# Altium PCB H_bridge_PCB.PcbDoc
Units mil, origin at the board's own origin, x right, y up, seen from the top; angles counter-clockwise.
Board outline 3775 x 4000 mil, 2 copper layers (Top Layer, Bottom Layer); 43 components, 40 nets, 147 pads, 6 vias.
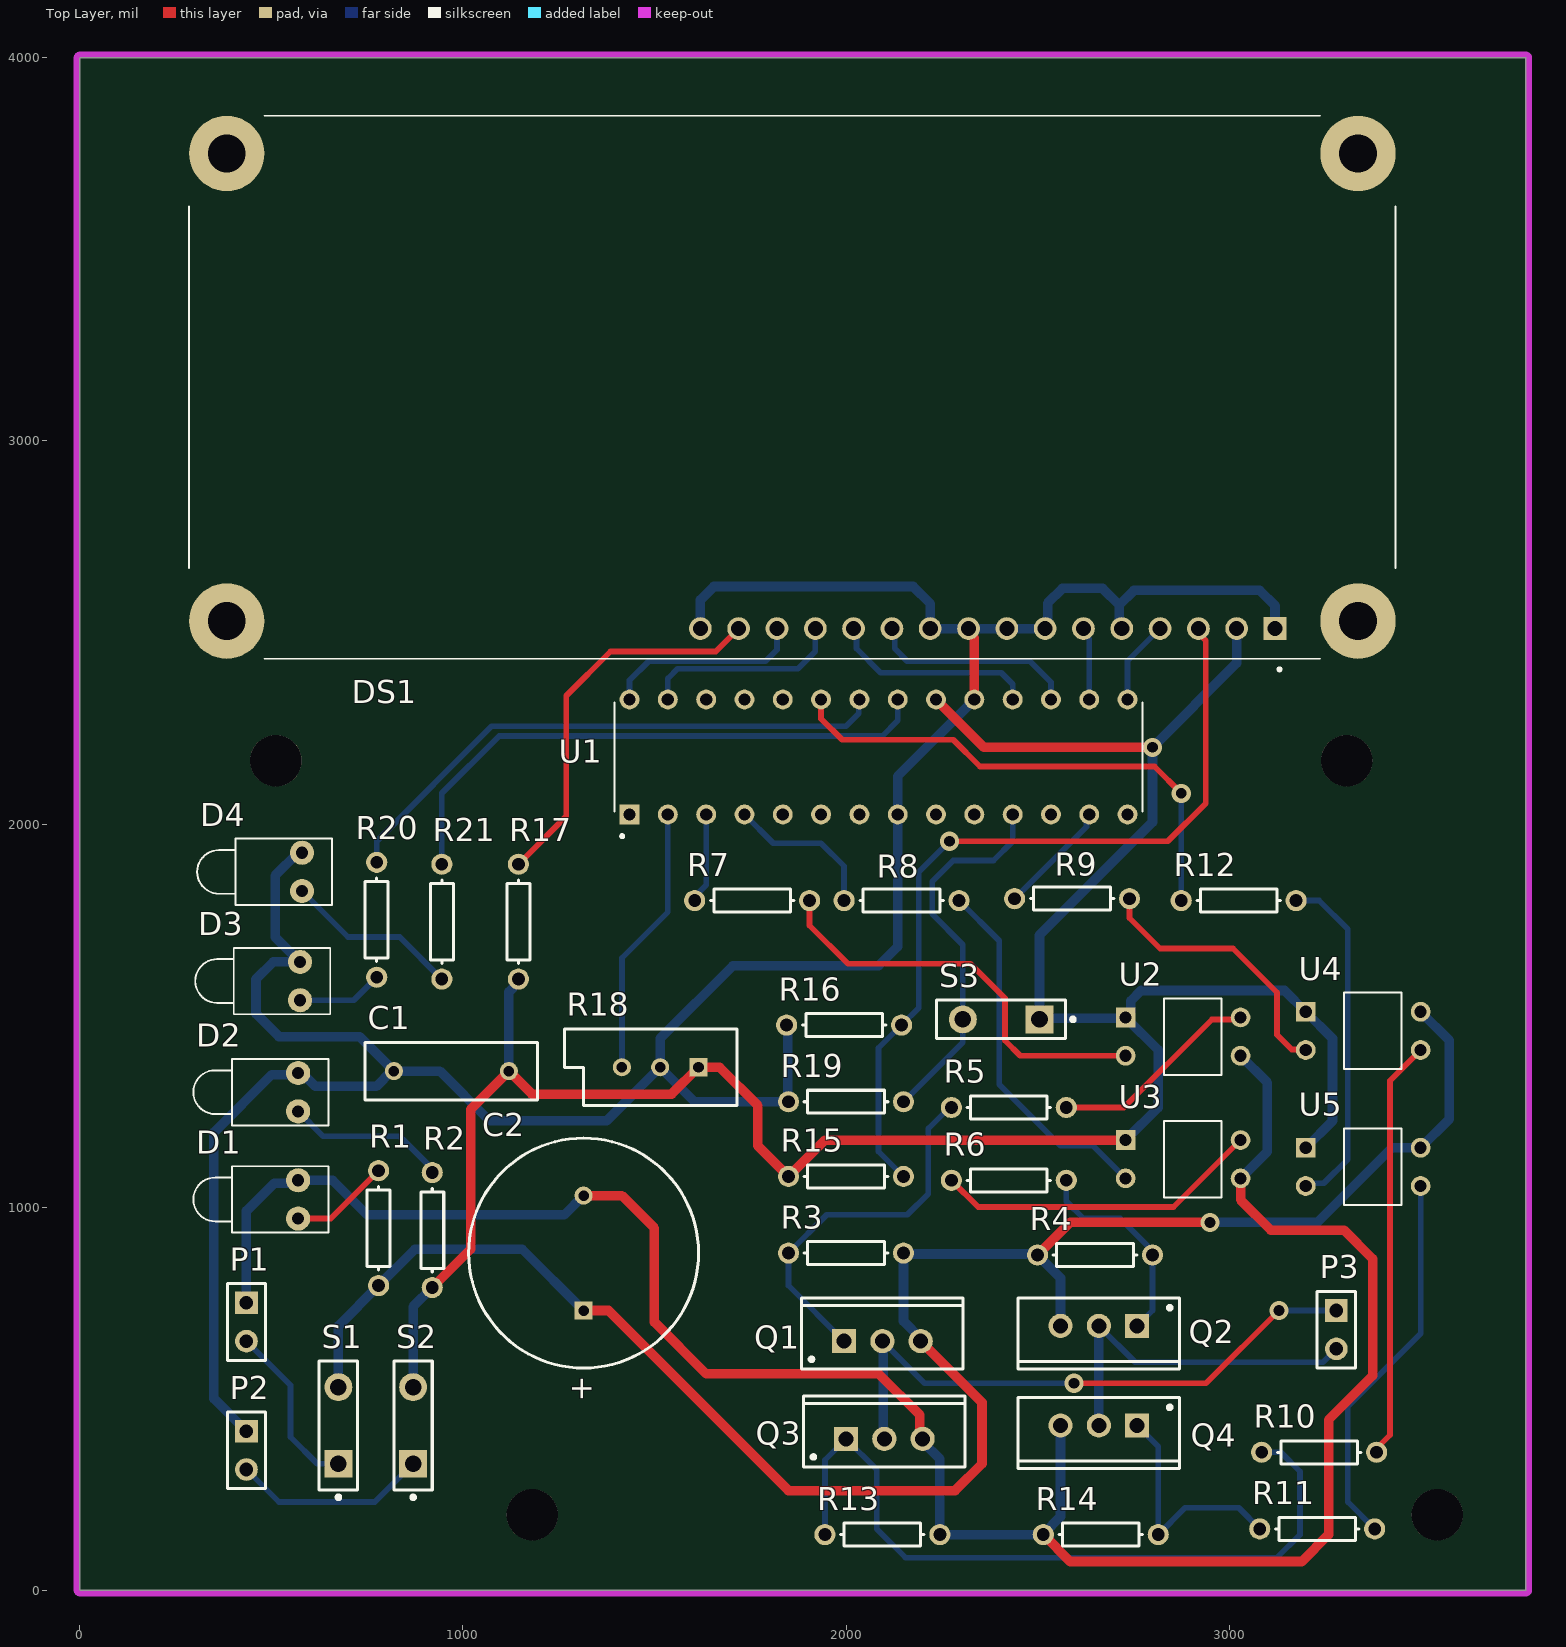
[diagram p0: Top Layer view]
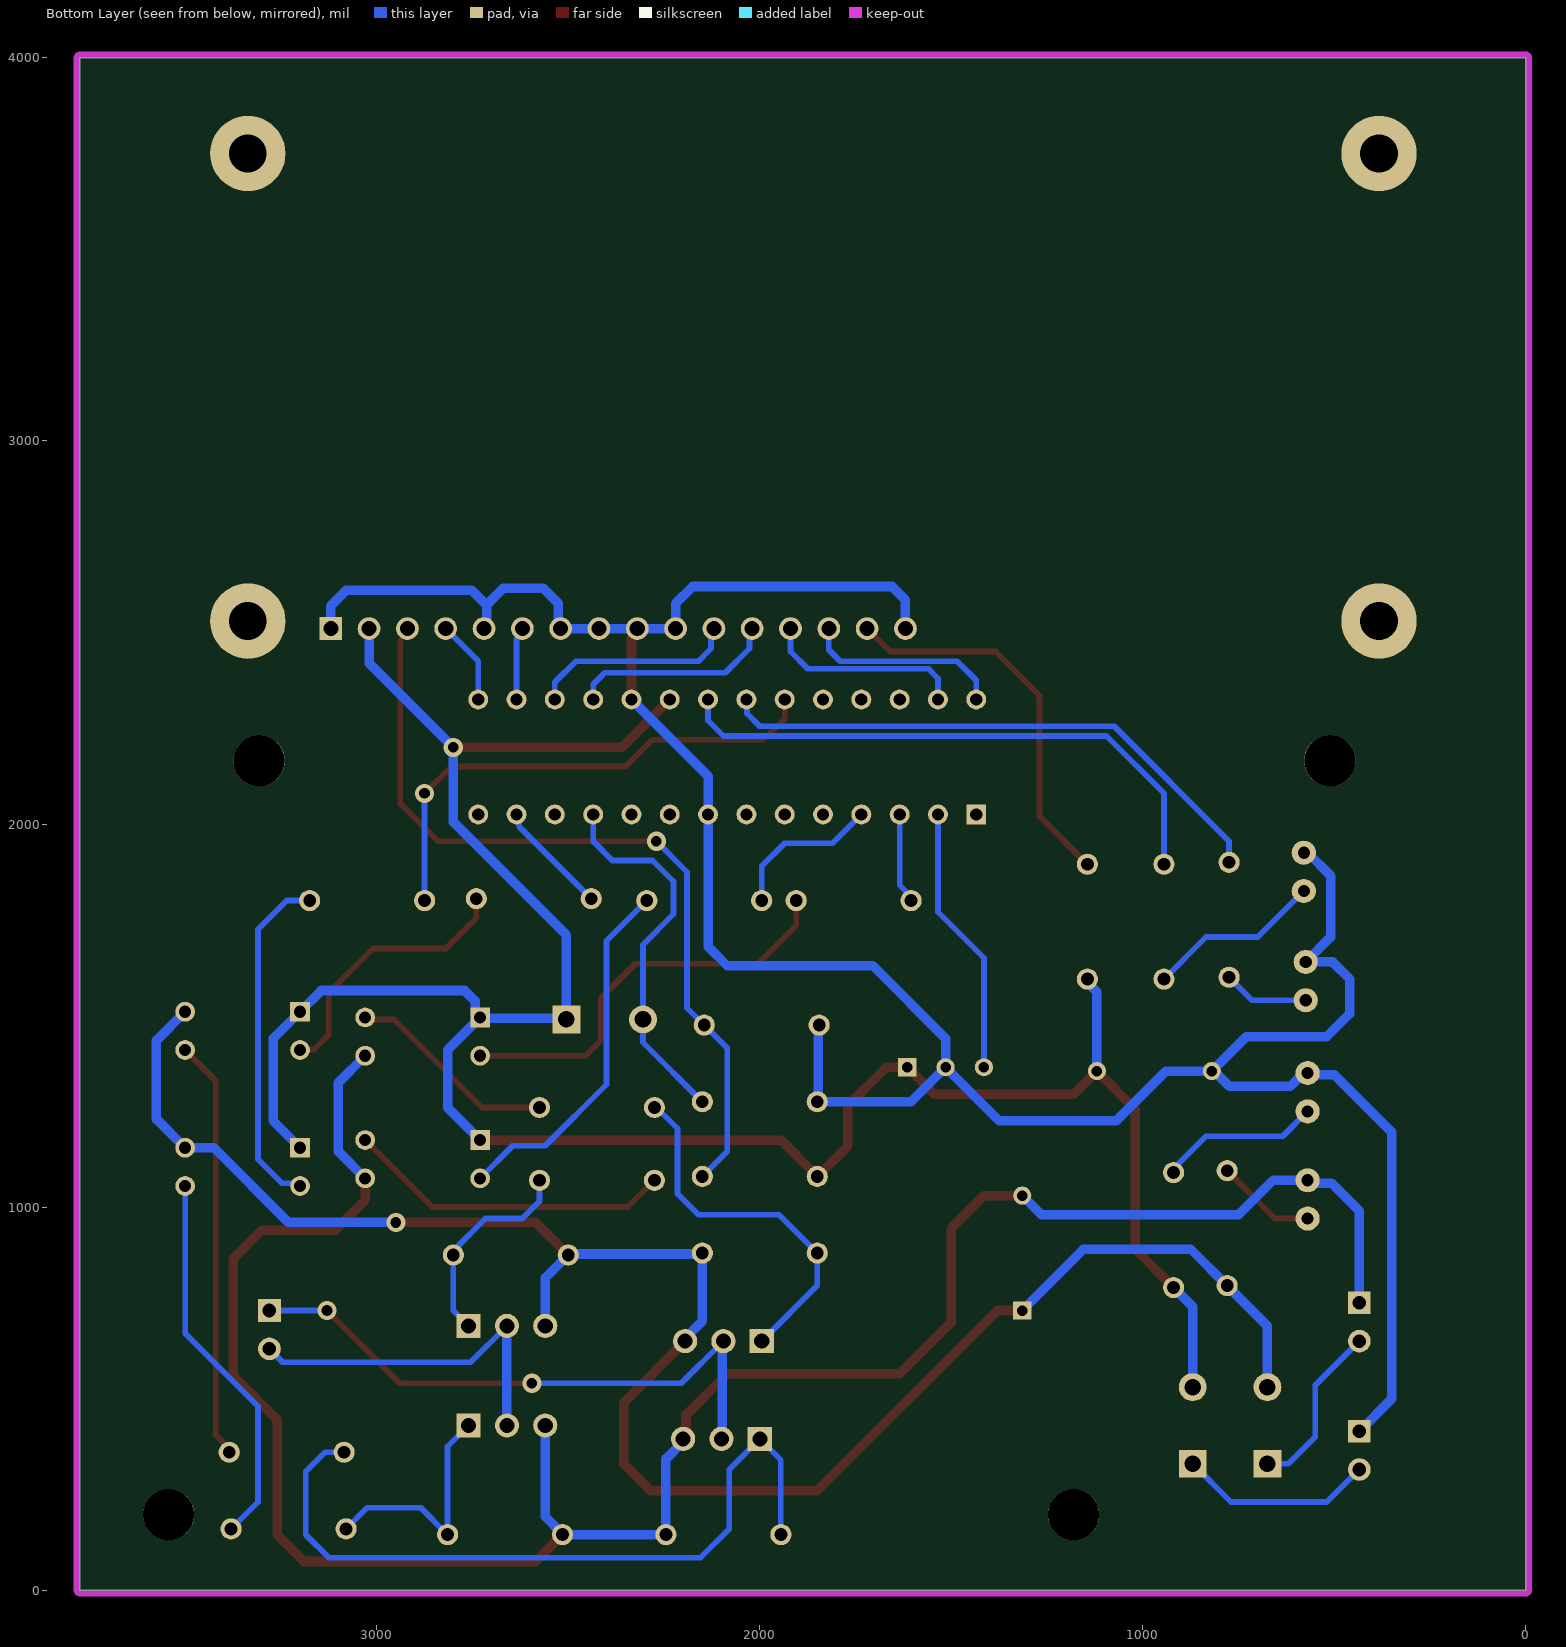
[diagram p1: Bottom Layer view, seen from below]

## Layer stack, top to bottom
Top Solder: solder mask 0.4, Solder Resist, Dk 3.5
Top Layer: signal copper 1.4
Dielectric 1: dielectric 12.6, FR-4, Dk 4.8
Bottom Layer: signal copper 1.4
Bottom Solder: solder mask 0.4, Solder Resist, Dk 3.5

## Board outline
0,0 3775,0 3775,4000 0,4000

## Design rules (kind name [scope] priority, off if disabled: settings)
BoardOutlineClearance [All] p1: gap=7.87 ignorepadtopadclearanceinfootprint=FALSE except(15.75: Arc-SplitBarrior Arc-SplitContinuation Track-SplitBarrior Track-SplitContinuation SMDPad-SplitBarrior SMDPad-SplitContinuation THPad-SplitBarrior THPad-SplitContinuation Via-SplitBarrior Via-SplitContinuation Fill-SplitBarrior Fill-SplitContinuation Poly-SplitBarrior Poly-SplitContinuation Region-SplitBarrior Region-SplitContinuation Text-SplitBarrior Text-SplitContinuation)
Clearance "Clearance Bottom Layer" [OnLayer('Bottom Layer')] p1: gap=8 ignorepadtopadclearanceinfootprint=TRUE except(10: Arc-Text Track-Text SMDPad-Text THPad-Text Via-Text Fill-Text Poly-Text Region-Text Text-Text)
Clearance "Clearance Top Layer" [OnLayer('Top Layer')] p2: gap=8 ignorepadtopadclearanceinfootprint=TRUE except(10: Arc-Text Track-Text SMDPad-Text THPad-Text Via-Text Fill-Text Poly-Text Region-Text Text-Text)
Clearance [All] p3: gap=7.87 ignorepadtopadclearanceinfootprint=FALSE except(3.5: Arc-Arc Arc-Track Arc-SMDPad Track-Track Track-SMDPad SMDPad-SMDPad; 5: Arc-Via Track-Via SMDPad-Via THPad-Via Via-Via; 10: Arc-Text Track-Text SMDPad-Text THPad-Text Via-Text Fill-Text Poly-Text Region-Text Text-Text)
HoleSize [All] p1: absolutevalues=TRUE maxlimit=248.03 minlimit=7.87 maxpercent=80.000 minpercent=20.000
MinimumAnnularRing [All] p1: minimumring=3
MinimumSolderMaskSliver [All] p1: minsoldermaskwidth=3.94
PolygonConnect PolygonConnect_1 [All] p1: thpad.connectstyle=Relief thpad.reliefconductorwidth=20 thpad.reliefentries=4 thpad.polygonreliefangle="90 Angle" thpad.airgapwidth=10 smdpad.connectstyle=Relief smdpad.reliefconductorwidth=20 smdpad.reliefentries=4 smdpad.polygonreliefangle="90 Angle" smdpad.airgapwidth=10 via.connectstyle=Direct via.reliefconductorwidth=20 via.reliefentries=4 via.polygonreliefangle="90 Angle" via.airgapwidth=10
RoutingVias [All] p1: holewidth=28 width=50 viastyle="Through Hole" minholewidth=8 minwidth=16 maxholewidth=28 maxwidth=50
SilkToSilkClearance [All] p1: silktosilkclearance=3.94
SilkToSolderMaskClearance [IsPad] p1: minsilkscreentomaskgap=3.94 clearancetoexposedcopper=TRUE
SolderMaskExpansion [All] p1: expansion=4 istentingtop=FALSE
Width POWER [InNetClass('POWER')] p1: maxlimit=25 minlimit=5 preferedwidth=25 minimp=50.000000 maximp=50.000000 favimp=50.000000
Width [InNetClass('SIGNALS')] p2: maxlimit=25 minlimit=5 preferedwidth=15 minimp=50.000000 maximp=50.000000 favimp=50.000000
26 further rules are at their usual default settings.

## Classes and differential pairs
net class SIGNALS: LCD_D4 LCD_D5 LCD_D6 LCD_D7 LCD_EN LCD_RS NetD1_1 NetD2_1 NetD3_1 NetD4_1 NetDS1_3 NetDS1_15 NetP1_2 NetP2_2 NetQ1_1 NetQ2_1 NetQ3_1 NetQ4_1 NetR5_1 NetR6_1 NetR7_1 NetR7_2 NetR8_1 NetR8_2 NetR9_1 NetR9_2 NetR10_2 NetR11_2 NetR12_1 NetR12_2 NetR18_3 NetR19_2 NetR20_2 NetR21_2
net class POWER: +5 +12 GND MCUGND NetP3_1 NetP3_2
net class LCD_D[4..7]: LCD_D4 LCD_D5 LCD_D6 LCD_D7
component class "U_Power Supply": D1 D2 P1 P2 R1 R2 S1 S2
component class U_Microcontroller: C1 U1
component class U_H_bridge: C2 Q1 Q2 Q3 Q4 R3 R4 R5 R6 R7 R8 R9 R10 R11 R12 R13 R14 U2 U3 U4 U5
component class Top_level: D3 D4 DS1 P3 R15 R16 R17 R18 R19 R20 R21 S3

## Components (designator, comment, footprint, x,y, rotation, side; value= is the part's Value field where it differs from the comment)
C1 "Cap" RAD-0.3 970,1355 r0 top value=0.1uF
C2 "Cap Pol1" RB7.6-15 1315,880 r270 top value="100uF / 25V"
D1 "POWER LED" LED-1 570,1020 r180 top
D2 "5V LED" LED-1 570,1300 r180 top
D3 "LED1" LED-1 575,1590 r180 top
D4 "LED1" LED-1 580,1875 r180 top
DS1 "LCD2X16" LCD_LCD2X16 1860,3140 r180 top
P1 "12VIN" HDR1X2 435,750 r270 top
P2 "5VIN" HDR1X2 435,415 r270 top
P3 "OUTPUT" HDR1X2 3280,730 r270 top
Q1 "IRF4905" TO-220AB 2095,650 r0 top
Q2 "IRF4905" TO-220AB 2660,690 r180 top
Q3 "IRLZ44n" TO-220AB 2100,395 r0 top
Q4 "IRLZ44n" TO-220AB 2660,430 r180 top
R1 "Res1" AXIAL-0.3 780,945 r270 top value=510R
R2 "Res1" AXIAL-0.3 920,940 r270 top value=330R
R3 "Res1" AXIAL-0.3 2000,880 r0 top value=470R
R4 "Res1" AXIAL-0.3 2650,875 r180 top value=470R
R5 "Res1" AXIAL-0.3 2425,1260 r180 top value=750R
R6 "Res1" AXIAL-0.3 2425,1070 r0 top value=750R
R7 "Res1" AXIAL-0.3 1755,1800 r0 top value=330R
R8 "Res1" AXIAL-0.3 2145,1800 r0 top value=330R
R9 "Res1" AXIAL-0.3 2590,1805 r180 top value=330R
R10 "Res1" AXIAL-0.3 3235,360 r0 top value=750R
R11 "Res1" AXIAL-0.3 3230,160 r0 top value=750R
R12 "Res1" AXIAL-0.3 3025,1800 r180 top value=330R
R13 "Res1" AXIAL-0.3 2095,145 r0 top value=470R
R14 "Res1" AXIAL-0.3 2665,145 r180 top value=470R
R15 "Res1" AXIAL-0.3 2000,1080 r0 top value=1K
R16 "Res1" AXIAL-0.3 1995,1475 r0 top value=1K
R17 "Res1" AXIAL-0.3 1145,1745 r90 top value=100R
R18 "RPot" VR5 1515,1365 r180 top value=10K
R19 "Res1" AXIAL-0.3 2000,1275 r0 top value=10K
R20 "Res1" AXIAL-0.3 775,1750 r90 top value=330R
R21 "Res1" AXIAL-0.3 945,1745 r90 top value=330R
S1 "POWER SWITCH" SPST-2 675,430 r90 top
S2 "5V Switch" SPST-2 870,430 r90 top
S3 "DIR CTRL" SPST-2 2405,1490 r180 top
U1 "PIC16F886-I/SP" DIP762W46P254L3467H457Q28 2085,2175 r90 top
U2 "TLP521-1" TLP521-1 2730,1495 r0 top
U3 "TLP521-1" TLP521-1 2730,1175 r0 top
U4 "TLP521-1" TLP521-1 3200,1510 r0 top
U5 "TLP521-1" TLP521-1 3200,1155 r0 top

## Footprints (in the part's own frame and the unit in brackets; to place one, negate y for a bottom-side part, rotate by r counter-clockwise, add the part's x,y. Pads: shape width x height; smd on the part's side, far side on the other; paste and mask are expansions set on the pad)
AXIAL-0.3 [mm] "Axial Device, Thru-Hole; 2 Leads; 0.3 in Pin Spacing"
  round 1.4 hole 0.85: 1(-3.81,0) 2(3.81,0)
  silkscreen extent -2.77,-0.76 2.77,0.76
DIP762W46P254L3467H457Q28 [mil]
  rect 52x52 hole 32: 1(-150,650)
  round 52 hole 32: 2(-150,550) 3(-150,450) 4(-150,350) 5(-150,250) 6(-150,150) 7(-150,50) 8(-150,-50) 9(-150,-150) 10(-150,-250) 11(-150,-350) 12(-150,-450) 13(-150,-550) 14(-150,-650) 15(150,-650) 16(150,-550) 17(150,-450) 18(150,-350) 19(150,-250) 20(150,-150) 21(150,-50) 22(150,50) 23(150,150) 24(150,250) 25(150,350) 26(150,450) 27(150,550) 28(150,650)
  silkscreen extent -211,-689 143,689
HDR1X2 [mm] "Connector; Header; 2 Position"
  rect 1.5x1.5 hole 0.9: 1(0,0)
  round 1.5 hole 0.9: 2(2.54,0)
  silkscreen extent -1.27,-1.27 3.81,1.27
LCD_LCD2X16 [mm]
  rect 1.508x1.508 hole 1: 1(-32,16)
  round 1.508 hole 1: 2(-29.46,16) 3(-26.92,16) 4(-24.38,16) 5(-21.84,16) 6(-19.3,16) 7(-16.76,16) 8(-14.22,16) 9(-11.68,16) 10(-9.14,16) 11(-6.6,16) 12(-4.06,16) 13(-1.52,16) 14(1.02,16) 15(3.56,16) 16(6.1,16)
  round 5 hole 2.5: S1(-37.5,15.5) S2(37.5,15.5) S3(37.5,-15.5) S4(-37.5,-15.5)
  silkscreen extent -40,-18 40,18.8
LED-1 [mm] "LED; 2 Leads"
  round 1.6 hole 0.8: 1(0,1.27) 2(0,-1.27)
  silkscreen extent -2,-2.2 6.95,2.2
RAD-0.3 [mm] "Radial Cap, Thru-Hole; 2 Leads; 0.3 in Pin Spacing"
  round 1.2 hole 0.7: 1(-3.81,0) 2(3.81,0)
  silkscreen extent -5.71,-1.91 5.71,1.91
RB7.6-15 [mm] "Polarized Capacitor (Radial); 2 Leads"
  rect 1.2x1.2 hole 0.7: 1(3.81,0)
  round 1.2 hole 0.7: 2(-3.81,0)
  silkscreen extent -7.62,-7.62 7.62,7.62
SPST-2 [mm] "Switch; 2 Leads"
  rect 1.85x1.85 hole 1.1: 1(-2.54,0)
  round 1.85 hole 1.1: 2(2.54,0)
  silkscreen extent -4.89,-1.27 4.28,1.27
TLP521-1 [mm]
  rect 1.308x1.308 hole 0.8: P$1(0,0)
  round 1.308 hole 0.8: P$2(0,-2.54) P$3(7.62,-2.54) P$4(7.62,0)
  silkscreen extent 2.54,-3.81 6.35,1.27
TO-220AB [mm] "TO, Thru-Hole, Vertical, Heatsink Mounted; 3 In-Line Leads; Pitch 2.54 mm"
  rect 1.6x1.6 hole 1: 1(-2.54,0)
  round 1.6 hole 1: 2(0,0) 3(2.54,0)
  silkscreen extent -5.35,-1.85 5.35,2.85, body extent -5.4,-1.9 5.4,2.9, height 19.3
VR5 [mm] "Thru-Hole; 3 Leads"
  rect 1.2x1.2 hole 0.7: 1(-2.54,0)
  round 1.2 hole 0.7: 2(0,0) 3(2.54,0)
  silkscreen extent -5.08,-2.54 6.35,2.54

## Part data
C1: "Capacitor", LatestRevisionDate=17-Jul-2002, LatestRevisionNote="Re-released for DXP Platform.", PackageDescription="Radial Cap, Thru-Hole; 2 Leads; 0.3 in Pin Spacing", PackageReference=RAD-0.3, Published=8-Jun-2000, Publisher="Altium Limited"
C2: "Polarized Capacitor (Radial)", LatestRevisionDate=17-Jul-2002, LatestRevisionNote="Re-released for DXP Platform.", PackageDescription="Polarized Capacitor (Radial); 2 Leads", PackageReference=RB7.6-15, Published=8-Jun-2000, Publisher="Altium Limited"
D1 D2: library part LED1, "Typical RED GaAs LED", LatestRevisionDate=08-Jul-2005, LatestRevisionNote="Mech Layer 1 removed.", PackageDescription="LED; 2 Leads", PackageReference=LED-1, Published=8-Jun-2000, Publisher="Altium Limited"
D3 D4: "Typical RED GaAs LED", LatestRevisionDate=08-Jul-2005, LatestRevisionNote="Mech Layer 1 removed.", PackageDescription="LED; 2 Leads", PackageReference=LED-1, Published=8-Jun-2000, Publisher="Altium Limited"
DS1: "Display; Display: LCD 2x16 characters (blue backlight)", Package=None, Availability=Unavailable, MF=mikroElektronika, MP=LCD2X16, Price=None, SnapEDA_Link=https://www.snapeda.com/parts/LCD2X16/mikroElektronika/view-part/2472530/?ref=snap
P1 P2 P3: library part "Header 2", "Header, 2-Pin", LatestRevisionDate=17-Jul-2002, LatestRevisionNote="Re-released for DXP Platform.", Publisher="Altium Limited"
Q1 Q2: library part PMOS-2, "P-Channel Power MOSFET", ComponentLink1Description="Manufacturer Link", ComponentLink1URL=http://www.irf.com/, DatasheetVersion=PD-9.390D, LatestRevisionDate=17-Jul-2002, LatestRevisionNote="Re-released for DXP Platform.", Note="Pin 4 not drawn and electrically connected to Pin 2.", PackageDescription="TO, Thru-Hole, Vertical, Heatsink Mounted; 3 In-Line Leads; Pitch 2.54 mm", PackageReference=TO-220AB, PackageVersion=Feb-1997, Published=8-Jun-2000, Publisher="Altium Limited"
Q3 Q4: library part NMOS-2, "N-Channel Power MOSFET", ComponentLink1Description="Manufacturer Link", ComponentLink1URL=http://www.irf.com/, DatasheetVersion=PD-9.814, LatestRevisionDate=17-Jul-2002, LatestRevisionNote="Re-released for DXP Platform.", Note="Pin 2 is electrically connected to pin 4.", PackageDescription="TO, Thru-Hole, Vertical, Heatsink Mounted; 3 In-Line Leads; Pitch 2.54 mm", PackageReference=TO-220AB, PackageVersion=Feb-1997, Published=8-Jun-2000, Publisher="Altium Limited"
R1 R2 R3 R4 R5 R6 R7 R8 R9 R10 R11 R12 R13 R14 R15 R16 R17 R19 R20 R21: "Resistor", LatestRevisionDate=17-Jul-2002, LatestRevisionNote="Re-released for DXP Platform.", PackageDescription="Axial Device, Thru-Hole; 2 Leads; 0.3 in Pin Spacing", PackageReference=AXIAL-0.3, Published=8-Jun-2000, Publisher="Altium Limited"
R18: "Potentiometer", LatestRevisionDate=17-Jul-2002, LatestRevisionNote="Re-released for DXP Platform.", PackageDescription="Variable Resistor, Thru-Hole; 3 Leads", PackageReference=VR5, Published=8-Jun-2000, Publisher="Altium Limited", Set Position=0.5, Sim Note="Enter the Resistance value and the set point into parameter fields."
S1 S2 S3: library part SW-SPST, "Single-Pole, Single-Throw Switch", LatestRevisionDate=17-Jul-2002, LatestRevisionNote="Re-released for DXP Platform.", PackageDescription="Switch; 2 Leads", PackageReference=SPST-2, Published=24-Mar-1999, Publisher="Altium Limited"
U1: "PIC PICÂ® 16F Microcontroller IC 8-Bit 20MHz 14KB _8K x 14_ FLASH 28-SPDIP", Package="DIP-28 Microchip", Availability=Unavailable, MF=Microchip, MP=PIC16F886-I/SP, Price=None, SnapEDA_Link=https://www.snapeda.com/parts/PIC16F886-I/SP/Microchip/view-part/44176/?ref=snap
U2 U3 U4 U5: "ICM006", Package=None, Availability=Unavailable, MF=Isocom, MP=TLP521-1, Price=None, SnapEDA_Link=https://www.snapeda.com/parts/TLP521-1/Isocom/view-part/918682/?ref=snap

## Free pads (board coordinates)
  round 133.86 hole 133.86 unplated: 1(1181.1,196.85) 2(511.81,2165.35) 3(3307.09,2165.35)
  round 133.86 hole 133.86: 4(3543.31,196.85)

## Via types
v1: diameter 50, hole 28, Top Layer to Bottom Layer, 6 vias

## Nets (pads, with @x,y where several pads share a name; then routed paths per layer and width w, separated by ;. In a path a pad name is that pad's centre, name@x,y a point inside that pad or via, vN(x,y) a via of type N, cw(c..) or ccw(c..) an arc to the next point about the centre after c; other vN are vias at no path point)
+5: C1.2 DS1.2 R2.2 R15.1 R17.1 R18.1 S2.2 S3.1 U1.20 U2.P$1 U3.P$1 U4.P$1 U5.P$1 | length 6482.5
  Top Layer w25: R2.2 1020,890 1020,1255 C1.2 1180,1295 1545,1295 R18.1 1670,1365 1770,1265 1770,1160 R15.1 1945,1175 U3.P$1 ; U1.20 2360,2200 v1(2800,2200)
  Bottom Layer w15: R2.2 R2.2@920.4,789.6
  Bottom Layer w25: S2.2 870,740 R2.2 ; C1.2 1120,1561.85 1145,1586.85 R17.1 ; U3.P$1 2815,1260 2815,1410 U2.P$1 ; DS1.2 3019.84,2419.84 v1(2800,2200) 2800,2005 2505,1710 S3.1 2507.5,1492.5 2727.5,1492.5 U2.P$1 ; U5.P$1 3270,1225 3270,1440 U4.P$1 3144.64,1565.36 2770.36,1565.36 2743.25,1538.25 2743.25,1508.25 U2.P$1
+12: C2.1 Q1.3 Q2.3 R1.2 R3.2 R4.2 S1.2 U4.P$4 U5.P$4 | length 4942.7
  Top Layer w25: C2.1 1380,730 1850,260 2285,260 2355,330 2355,490 Q1.3 ; R4.2 2585,960 v1(2950,960)
  Bottom Layer w25: S1.2 675,690 R1.2 875,890 1155,890 C2.1 ; Q1.3 2195,657.58 2150,702.58 R3.2 2152.5,877.5 2497.5,877.5 R4.2 2560,815 Q2.3 ; v1(2950,960) 3230,960 3425,1155 U5.P$4 3575,1230 3575,1435 U4.P$4
GND: C2.2 D1.2 P1.1 Q3.3 Q4.3 R13.2 R14.2 U2.P$3 U3.P$3 | length 5814.8
  Top Layer w25: C2.2 1415,1030 1500,945 1500,700 1635,565 2085,565 2192.73,457.27 2192.73,402.27 Q3.3 ; R14.2 2585,75 3190,75 3260,145 3260,445 3375,560 3375,865 3300,940 3108.77,940 3030,1018.77 U3.P$3
  Bottom Layer w25: P1.1@452.03,732.97 P1.1 435,990 507.73,1062.73 562.73,1062.73 D1.2 660,1070 750,980 1265,980 C2.2 ; Q3.3 2200,387.42 2245,342.42 R13.2 R14.2 2515,147.01 2560,192.01 Q4.3 ; U3.P$3 3100,1145 3100,1325 U2.P$3
LCD_D4: DS1.11 U1.17 | length 544.5
  Bottom Layer w15: DS1.11 2127.11,2502.81 2127.11,2457.89 2160,2425 2480,2425 2535,2370 U1.17
LCD_D5: DS1.12 U1.18 | length 541.6
  Bottom Layer w15: DS1.12 2027.11,2502.81 2027.11,2457.89 2090,2395 2405,2395 2435,2365 U1.18
LCD_D6: DS1.13 U1.27 | length 529.1
  Bottom Layer w15: U1.27 1535,2380 1560,2405 1875,2405 1920,2450 1920,2509.92 DS1.13
LCD_D7: DS1.14 U1.28 | length 523.2
  Bottom Layer w15: U1.28 1435,2375 1485,2425 1790,2425 1819.84,2454.84 DS1.14
LCD_EN: DS1.6 U1.16 | length 191.4
  Bottom Layer w15: DS1.6 2619.84,2498.07 2635,2482.91 U1.16
LCD_RS: DS1.4 U1.15 | length 220.2
  Bottom Layer w15: U1.15 2735,2425.24 DS1.4
MCUGND: C1.1 D2.2 D3.2 D4.2 DS1.1 DS1.5 DS1.7 DS1.8 DS1.9 DS1.10 DS1.16 P2.1 R16.1 R18.2 R19.1 U1.8 U1.19 | length 7394.2
  Top Layer w25: DS1.9 2319.84,2500.78 2335,2485.62 U1.19
  Bottom Layer w25: P2.1 350,500 350,1195 501,1346 566,1346 D2.2 580.28,1350 615.28,1315 773.98,1315 813.98,1355 C1.1 ; D4.2 569.72,1925 510,1865.28 510,1705 D3.2 505,1640 460,1595 460,1505 520,1445 730,1445 C1.1 ; DS1.16 1619.84,2584.84 1655,2620 2175,2620 2219.84,2575.16 DS1.10 DS1.9 DS1.8 DS1.7 2526.42,2516.66 2526.42,2576.42 2565,2615 2670,2615 2713.27,2571.73 ; R16.1 1847.5,1472.5 1847.5,1277.5 R19.1 1605,1275 R18.2 ; U1.19 2135,2125 U1.8 2135,1680 2085,1630 1705,1630 1515,1440 R18.2 ; DS1.5 2713.27,2516.66 2713.27,2571.73 ; DS1.1 3119.84,2570.16 3080,2610 2751.53,2610 2713.27,2571.73 ; C1.1 940,1355 1070,1225 1375,1225 R18.2
NetD1_1: D1.1 R1.1 | length 274.8
  Top Layer w15: D1.1 655,970 R1.1
  Bottom Layer w15: D1.1@570,957.01 D1.1
NetD2_1: D2.1 R2.1 | length 422.1
  Bottom Layer w15: D2.1 635,1185 835,1185 920,1100 R2.1
NetD3_1: D3.1 R20.1 | length 224.9
  Bottom Layer w15: D3.1 715,1540 R20.1
NetD4_1: D4.1 R21.1 | length 460.3
  Bottom Layer w15: D4.1 700,1705 835,1705 R21.1
NetDS1_3: DS1.3 R15.2 R16.2 | length 2152.4
  Top Layer w15: v1(2270,1955) 2840,1955 2938.79,2053.79 2938.79,2479.13 2919.84,2498.07 DS1.3
  Bottom Layer w15: R15.2 2085,1145 2085,1415 R16.2 2190,1520 2190,1875 v1(2270,1955)
NetDS1_15: DS1.15 R17.2 | length 1014.1
  Top Layer w15: R17.2 1270,2020 1270,2335 1385,2450 1659.76,2450 DS1.15
NetP1_2: P1.2 S1.1 | length 451.6
  Bottom Layer w15: P1.2 550,535 550,400 620,330 S1.1
NetP2_2: P2.2 S2.1 | length 511.6
  Bottom Layer w15: P2.2 520,230 770,230 S2.1
NetP3_1: P3.1 Q1.2 Q3.2 | length 1562.8
  Top Layer w15: v1(2595,540) 2940,540 v1(3130,730)
  Bottom Layer w15: Q1.2@2097.5,647.5 2205,540 v1(2595,540) ; v1(3130,730) P3.1
  Bottom Layer w25: Q1.2 2097.5,647.5 2097.5,397.5 Q3.2
NetP3_2: P3.2 Q2.2 Q4.2 | length 933.8
  Bottom Layer w15: Q2.2 2755,595 3245,595 P3.2
  Bottom Layer w25: Q4.2 Q2.2
NetQ1_1: Q1.1 R3.1 R5.2 | length 972
  Bottom Layer w15: Q1.1 1850,795 R3.1 1950,980 2160,980 2215,1035 2215,1205 2270,1260 R5.2
NetQ2_1: Q2.1 R4.1 R6.2 | length 545.9
  Bottom Layer w15: R6.2 2575,1015 2620,970 2715.86,970 2800,885.86 2800,730 Q2.1
NetQ3_1: Q3.1 R10.1 R13.1 | length 1987.5
  Bottom Layer w15: R13.1 1945,340 Q3.1 2080,315 2080,160 2155,85 3125,85 3185,145 3185,310 3135.06,359.94 3085.06,359.94 R10.1
NetQ4_1: Q4.1 R11.1 R14.1 | length 624.6
  Bottom Layer w15: Q4.1 2815,375 R14.1 2885,215 3025,215 R11.1
NetR5_1: R5.1 U2.P$4 | length 552.3
  Top Layer w15: R5.1 2725,1260 2955,1490 3025,1490 U2.P$4
NetR6_1: R6.1 U3.P$4 | length 856.5
  Top Layer w15: R6.1 2345,1000 2855,1000 U3.P$4
NetR7_1: R7.1 U1.3 | length 237.4
  Bottom Layer w15: R7.1 1605,1810.79 1635,1840.79 U1.3
NetR7_2: R7.2 U2.P$2 | length 1095.3
  Top Layer w15: R7.2 1905,1735 2005,1635 2325,1635 2415,1545 2415,1435 2455,1395 U2.P$2
NetR8_1: R8.1 U1.4 | length 405.9
  Bottom Layer w15: U1.4 1810,1950 1935,1950 1995,1890 R8.1
NetR8_2: R8.2 U3.P$2 | length 955
  Bottom Layer w15: R8.2 2400,1695 2400,1320 2560,1160 2645,1160 U3.P$2
NetR9_1: R9.1 U4.P$2 | length 717.3
  Top Layer w15: R9.1 2740.06,1804.94 2740.06,1754.94 2820,1675 3010,1675 3125,1560 3125,1450 3163.38,1411.62 3198.38,1411.62 U4.P$2
NetR9_2: R9.2 U1.13 | length 300.8
  Bottom Layer w15: R9.2 2627.92,1992.92 2627.92,2017.92 U1.13
NetR10_2: R10.2 U4.P$3 | length 1097.6
  Top Layer w15: R10.2 3385,370 3420,405 3420,1330 U4.P$3
NetR11_2: R11.2 U5.P$3 | length 1002.7
  Bottom Layer w15: R11.2 3310,230 3310,480 3500,670 U5.P$3
NetR12_1: R12.1 U5.P$2 | length 905.1
  Bottom Layer w15: R12.1 3235,1800 3310,1725 3310,1125 3246.98,1061.98 3206.98,1061.98 U5.P$2
NetR12_2: R12.2 U1.23 | length 1350.8
  Top Layer w15: U1.23 1935,2275 1990,2220 2280,2220 2350,2150 2805,2150 v1(2875,2080)
  Bottom Layer w15: R12.2 v1(2875,2080)
NetR18_3: R18.3 U1.2 | length 709.7
  Bottom Layer w15: R18.3 1415,1650 1535,1770 U1.2
NetR19_2: R19.2 S3.2 U1.11 | length 995.8
  Bottom Layer w15: R19.2 2305,1430 S3.2 2305,1685 2225,1765 2225,1850 2280,1905 2385,1905 2435,1955 U1.11
NetR20_2: R20.2 U1.22 | length 1488.8
  Bottom Layer w15: R20.2 775,1955 1075,2255 2000,2255 2033.21,2288.21 2033.21,2323.21 U1.22
NetR21_2: R21.2 U1.21 | length 1508.7
  Bottom Layer w15: R21.2 945,2080 1095,2230 2095,2230 2135,2270 U1.21
pads on no net: DS1.S1 DS1.S2 DS1.S3 DS1.S4 U1.1 U1.5 U1.6 U1.7 U1.9 U1.10 U1.12 U1.14 U1.24 U1.25 U1.26

## Keep-outs
Keep-Out Layer:
  lines w16: -8,0 ccw(c0,0) 0,-8 ; -8,0 ccw(c0,0) 0,-8 ; -8,0 -8,4000 ; -8,4000 cw(c0,4000) 0,4008 ; -8,4000 cw(c0,4000) 0,4008 ; 0,-8 3775,-8 ; 0,4008 3775,4008 ; 3775,-8 ccw(c3775,0) 3783,0 ; 3775,-8 ccw(c3775,0) 3783,0 ; 3775,4008 cw(c3775,4000) 3783,4000 ; 3775,4008 cw(c3775,4000) 3783,4000 ; 3783,0 3783,4000

## Silkscreen, mask and mechanical layers (free items; w line width, h text height)
Route Tool Path:
  lines w8: -4,0 ccw(c0,0) 0,-4 ; -4,0 ccw(c0,0) 0,-4 ; -4,0 ccw(c0,0) 0,-4 ; -4,0 ccw(c0,0) 0,-4 ; -4,0 -4,4000 ; -4,0 -4,4000 ; -4,4000 cw(c0,4000) 0,4004 ; -4,4000 cw(c0,4000) 0,4004 ; -4,4000 cw(c0,4000) 0,4004 ; -4,4000 cw(c0,4000) 0,4004 ; 0,-4 3775,-4 ; 0,-4 3775,-4 ; 0,4004 3775,4004 ; 0,4004 3775,4004 ; 3775,-4 ccw(c3775,0) 3779,0 ; 3775,-4 ccw(c3775,0) 3779,0 ; 3775,-4 ccw(c3775,0) 3779,0 ; 3775,-4 ccw(c3775,0) 3779,0 ; 3775,4004 cw(c3775,4000) 3779,4000 ; 3775,4004 cw(c3775,4000) 3779,4000 ; 3775,4004 cw(c3775,4000) 3779,4000 ; 3775,4004 cw(c3775,4000) 3779,4000 ; 3779,0 3779,4000 ; 3779,0 3779,4000 ; 136,0 ccw(c140,0) 140,-4 cw(c140,0) 136,0 ; 136,4000 cw(c140,4000) 140,4004 ccw(c140,4000) 136,4000

## Text inside footprints (layer, text, board x,y; h text height)
C2: Top Overlay "+" at 1285.99,559.85 h59.06 r270